# Altium PCB AX309.REV.1.0.PcbDoc (part 2 of 10)
Units mil, origin at the board's own origin, x right, y up, seen from the top; angles counter-clockwise.
Board outline 5185 x 3614 mil, 4 copper layers (Top Layer, GND, Mid-Layer 1, Bottom Layer); 191 components, 352 nets, 1106 pads, 425 vias.
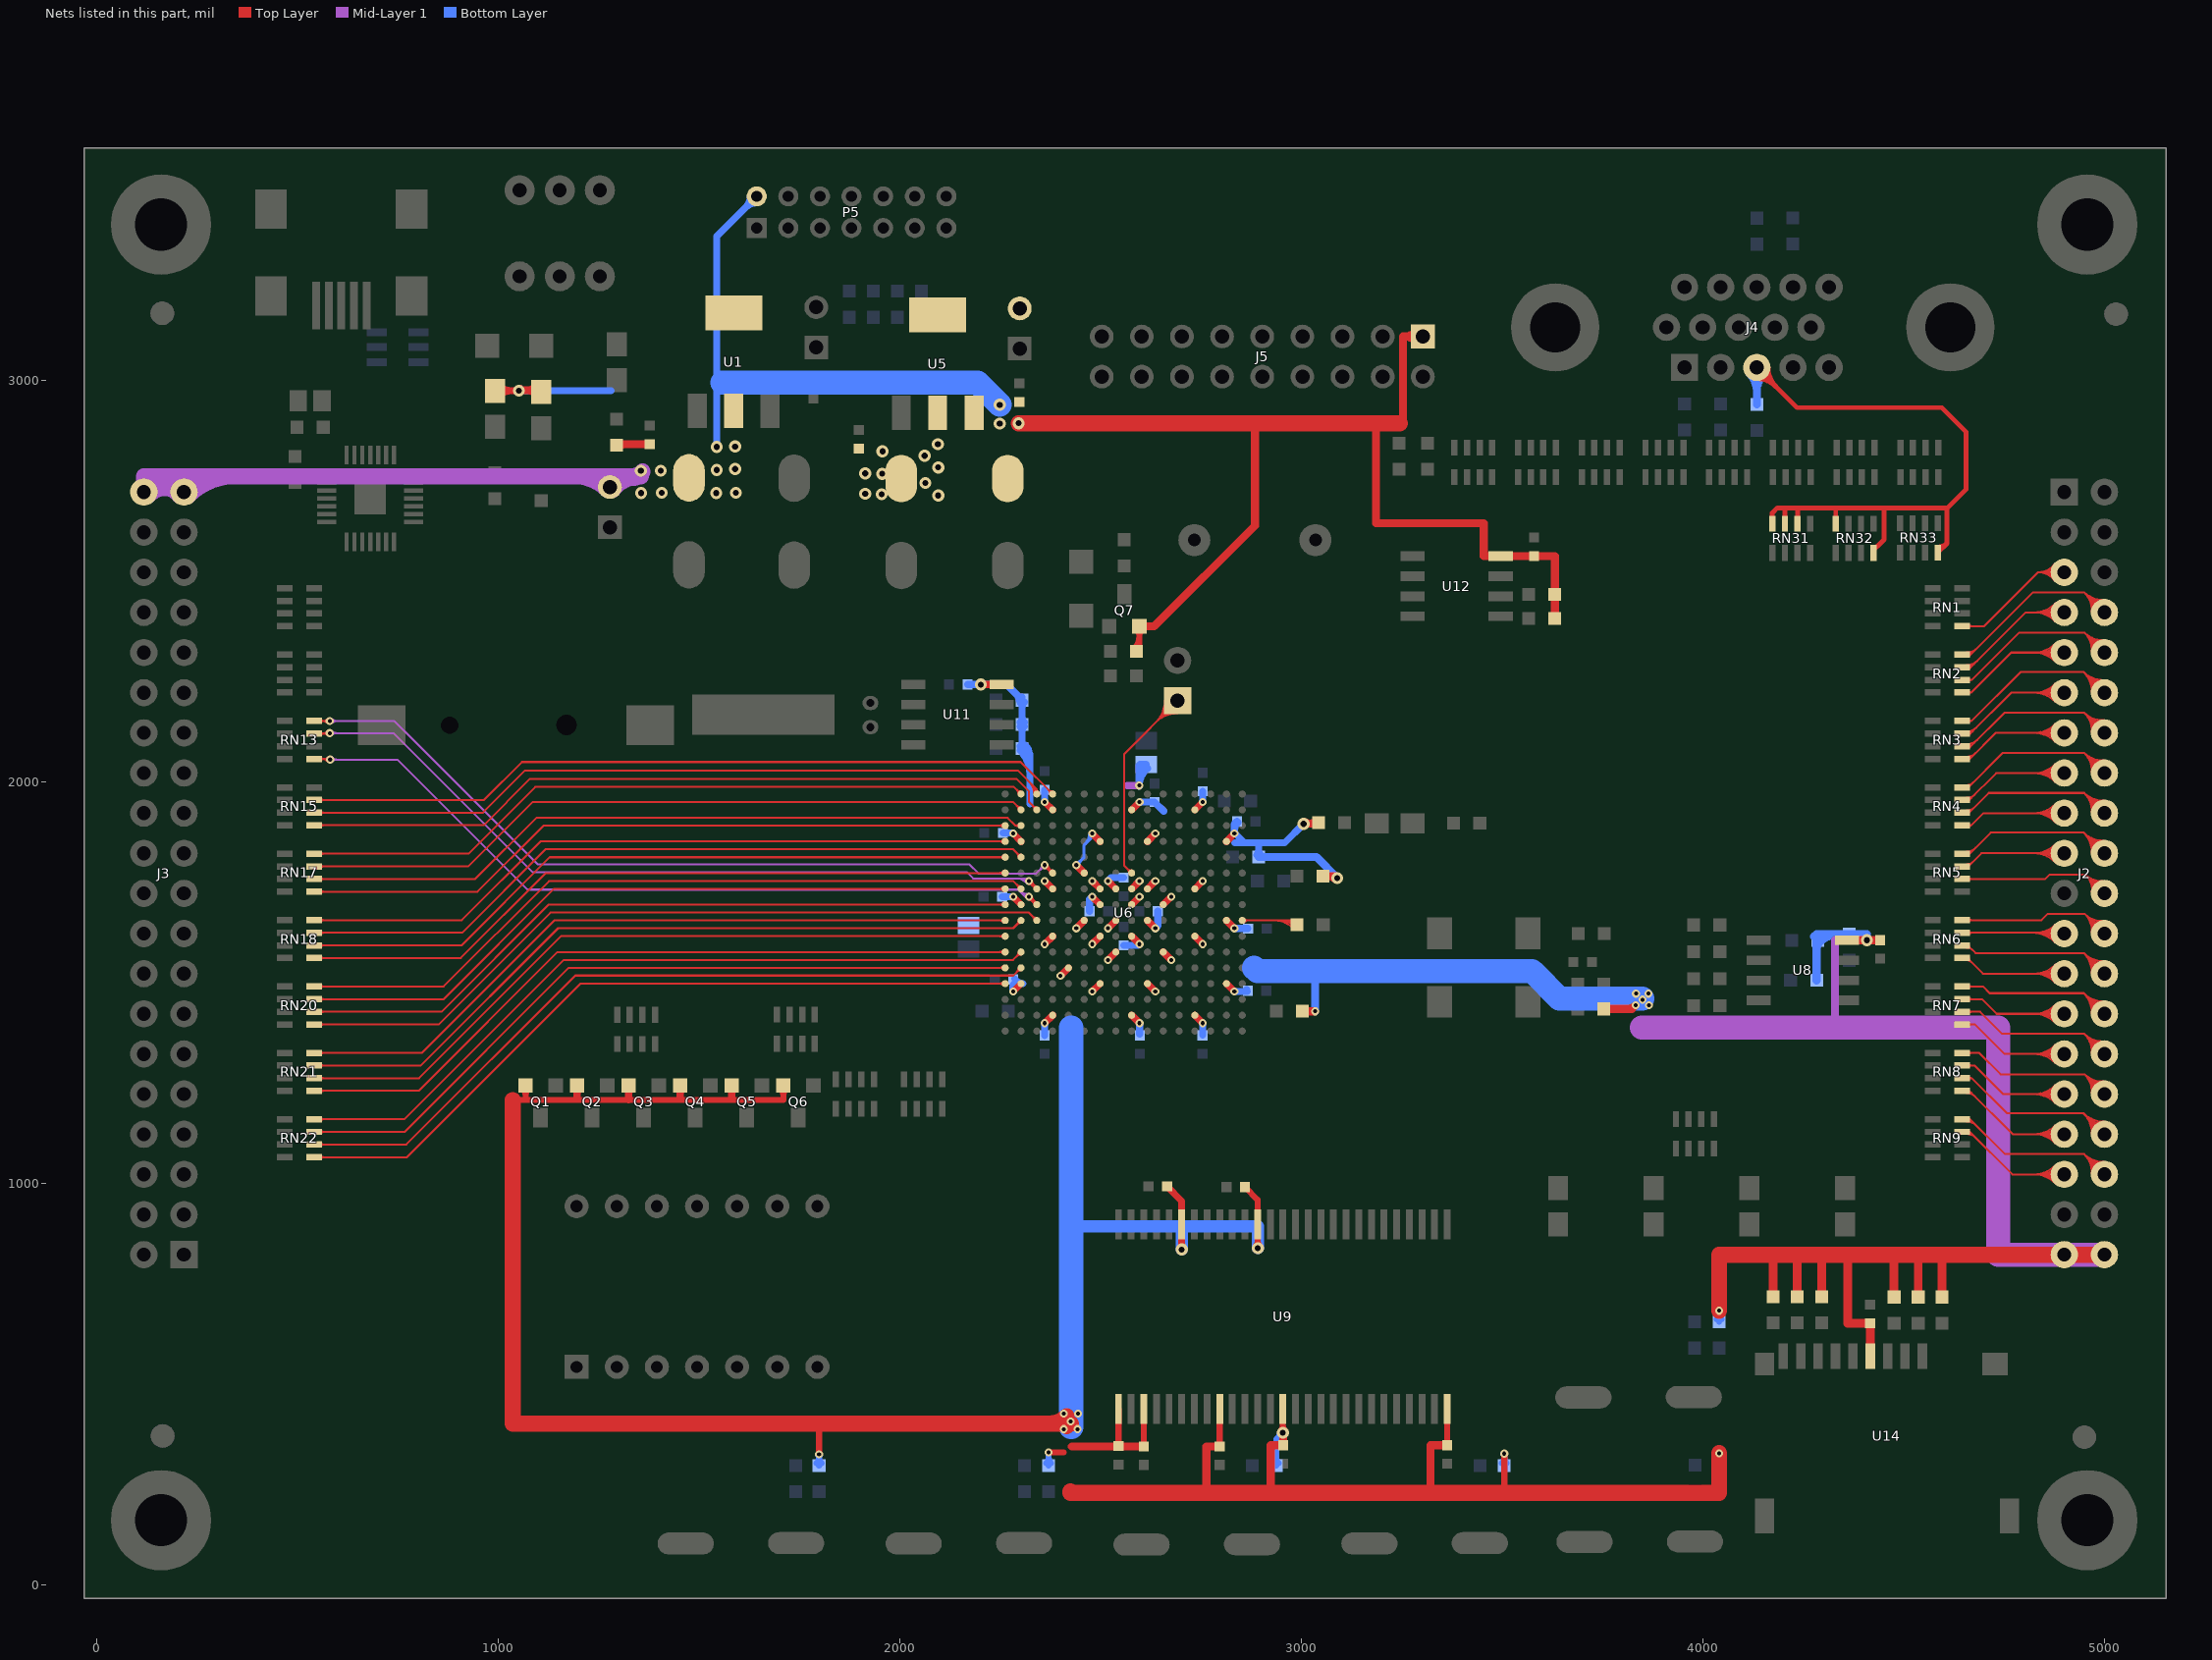
[diagram p4: the nets of this part, all layers, seen from the top]

## Via types
v1: diameter 20, hole 10, Top Layer to Bottom Layer, 328 vias
v2: diameter 30, hole 15, Top Layer to Bottom Layer, 95 vias
v3: diameter 40, hole 20, Top Layer to Bottom Layer, 2 vias

## Nets (pads, with @x,y where several pads share a name; then routed paths per layer and width w, separated by ;. In a path a pad name is that pad's centre, name@x,y a point inside that pad or via, vN(x,y) a via of type N, cw(c..) or ccw(c..) an arc to the next point about the centre after c; other vN are vias at no path point) (continued)
_L16: J2.5 RN1.5 | length 615.7
  Top Layer w5: RN1.5@4646.15,2387.51 4701.51,2387.51 4835.65,2521.65 ; RN1.5@4661.76,2383.71 cw(c4670.94,2374.54) 4670.94,2387.51 cw(c4670.94,2400.49) RN1.5@4661.76,2391.31 ; J2.5@4876.36,2502.03 ccw(c4835.66,2469.63) 4835.66,2521.65 ; J2.5@4876.36,2541.27 cw(c4835.66,2573.68) 4835.66,2521.65 ; J2.5@4880.27,2505.15 ccw(c4846.03,2477.89) 4846.03,2521.65 ccw(c4846.03,2565.42) J2.5@4880.27,2538.16 ; J2.5@4884.18,2508.26 ccw(c4856.4,2486.14) 4856.4,2521.65 ccw(c4856.4,2557.16) J2.5@4884.18,2535.05 ; J2.5@4888.09,2511.38 ccw(c4866.77,2494.4) 4866.77,2521.65 ccw(c4866.77,2548.9) J2.5@4888.09,2531.93 ; J2.5@4901,2521.65 4835.65,2521.65
_M4: J2.32 RN8.8 | length 735.9
  Top Layer w5: RN8.8@4646.15,1324.38 4688.62,1324.38 4742,1271 4951.65,1271 ; RN8.8@4661.76,1320.58 cw(c4670.94,1311.4) 4670.94,1324.38 cw(c4670.94,1337.35) RN8.8@4661.76,1328.17 ; J2.32@4969.56,1223.63 ccw(c4908.14,1227.48) 4951.66,1271 ; J2.32@4974.55,1223.31 ccw(c4922.88,1226.55) 4959.49,1263.16 ccw(c4996.1,1299.78) J2.32@4999.34,1248.1 ; J2.32@4979.54,1223 ccw(c4937.62,1225.63) 4967.32,1255.33 ccw(c4997.02,1285.04) J2.32@4999.65,1243.11 ; J2.32@4984.53,1222.69 ccw(c4952.36,1224.7) 4975.15,1247.5 ccw(c4997.95,1270.3) J2.32@4999.97,1238.12 ; J2.32@4999.03,1253.09 cw(c4995.18,1314.52) 4951.66,1271 ; J2.32@5001,1221.65 4951.65,1271
_M5: J2.35 RN9.7 | length 702.2
  Top Layer w5: RN9.7@4646.15,1127.5 4665.5,1127.5 4771.35,1021.65 J2.35@4901,1021.65 ; RN9.7@4657.96,1122.13 cw(c4657.96,1090.96) 4680,1113 ; RN9.7@4657.96,1127.13 cw(c4657.96,1108.04) 4671.46,1121.54 ; J2.35@4878.73,999.38 ccw(c4824.95,945.61) 4824.95,1021.65 ccw(c4824.95,1097.7) J2.35@4878.73,1043.93 ; J2.35@4882.26,1002.92 ccw(c4837.02,957.68) 4837.02,1021.65 ccw(c4837.02,1085.63) J2.35@4882.26,1040.39 ; J2.35@4885.8,1006.45 ccw(c4849.09,969.75) 4849.09,1021.65 ccw(c4849.09,1073.56) J2.35@4885.8,1036.86 ; J2.35@4889.33,1009.99 ccw(c4861.17,981.82) 4861.17,1021.65 ccw(c4861.17,1061.49) J2.35@4889.33,1033.32
_M15: J2.7 RN2.7 | length 748.9
  Top Layer w5: RN2.7@4646.15,2285.13 4668.13,2285.13 ; RN2.7@4657.96,2280.5 ccw(c4657.96,2293.88) 4667.42,2284.42 ; RN2.7@4657.96,2285.5 ccw(c4657.96,2310.95) 4675.96,2292.96 ; RN2.7@4657.96,2290.5 ccw(c4657.96,2328.02) 4684.49,2301.49 ; RN2.7@4662.4,2282.1 cw(c4668.13,2278.2) 4668.13,2285.13 ; RN2.7@4662.4,2288.16 ccw(c4668.13,2292.06) 4668.13,2285.13 ; J2.7@4878.73,2399.38 ccw(c4824.95,2345.61) 4824.95,2421.65 ccw(c4824.95,2497.7) J2.7@4878.73,2443.93 ; J2.7@4882.26,2402.92 ccw(c4837.02,2357.68) 4837.02,2421.65 ccw(c4837.02,2485.63) J2.7@4882.26,2440.39 ; J2.7@4885.8,2406.45 ccw(c4849.09,2369.75) 4849.09,2421.65 ccw(c4849.09,2473.56) J2.7@4885.8,2436.86 ; J2.7@4889.33,2409.99 ccw(c4861.17,2381.82) 4861.17,2421.65 ccw(c4861.17,2461.49) J2.7@4889.33,2433.32 ; J2.7@4901,2421.65 4804.65,2421.65 4668.13,2285.13
_M16: J2.8 RN2.8 | length 837.9
  Top Layer w5: RN2.8@4646.15,2316.62 4667.62,2316.62 ; RN2.8@4657.96,2312 ccw(c4657.96,2324.16) 4666.56,2315.56 ; RN2.8@4657.96,2317 ccw(c4657.96,2341.23) 4675.1,2324.1 ; RN2.8@4657.96,2322 ccw(c4657.96,2358.3) 4683.63,2332.63 ; RN2.8@4662.53,2313.79 cw(c4667.62,2310.62) 4667.62,2316.62 ; RN2.8@4662.53,2319.46 ccw(c4667.62,2322.63) 4667.62,2316.62 ; J2.8@4969.54,2423.15 ccw(c4904.9,2426.24) 4950.66,2472 ; J2.8@4974.53,2422.92 ccw(c4920.15,2425.51) 4958.65,2464.01 ccw(c4997.14,2502.5) J2.8@4999.74,2448.12 ; J2.8@4979.52,2422.68 ccw(c4935.41,2424.78) 4966.64,2456.02 ccw(c4997.87,2487.25) J2.8@4999.98,2443.13 ; J2.8@4984.52,2422.44 ccw(c4950.66,2424.06) 4974.63,2448.02 ccw(c4998.6,2471.99) J2.8@5000.21,2438.13 ; J2.8@4999.5,2453.12 cw(c4996.41,2517.76) 4950.66,2472 ; J2.8@5001,2421.65 4950.65,2472 ; 4667.62,2316.62 4823,2472 4950.65,2472
_N4: J2.36 RN9.8 | length 789.6
  Top Layer w5: RN9.8@4646.15,1159 4666,1159 ; RN9.8@4657.96,1153.63 cw(c4657.96,1121.24) 4680.86,1144.14 ; RN9.8@4657.96,1158.63 cw(c4657.96,1138.32) 4672.32,1152.68 ; RN9.8@4662.93,1156.95 cw(c4666,1155.67) 4666,1159 ; RN9.8@4662.93,1161.05 ccw(c4666,1162.33) 4666,1159 ; J2.36@4969.54,1023.15 ccw(c4904.9,1026.24) 4950.66,1072 ; J2.36@4974.53,1022.92 ccw(c4920.15,1025.51) 4958.65,1064.01 ccw(c4997.14,1102.5) J2.36@4999.74,1048.12 ; J2.36@4979.52,1022.68 ccw(c4935.41,1024.78) 4966.64,1056.02 ccw(c4997.87,1087.25) J2.36@4999.98,1043.13 ; J2.36@4984.52,1022.44 ccw(c4950.66,1024.06) 4974.63,1048.02 ccw(c4998.6,1071.99) J2.36@5000.21,1038.13 ; J2.36@4999.5,1053.12 cw(c4996.41,1117.76) 4950.66,1072 ; J2.36@5001,1021.65 4950.65,1072 ; 4666,1159 4753,1072 4950.65,1072
_N6: J2.34 RN8.6 | length 781.7
  Top Layer w5: RN8.6@4646.15,1261.38 4670.62,1261.38 ; RN8.6@4661.83,1257.65 cw(c4670.62,1249.17) 4670.62,1261.38 ; RN8.6@4661.83,1265.11 ccw(c4670.62,1273.6) 4670.62,1261.38 ; J2.34@4969.51,1122.26 ccw(c4898.29,1123.63) 4948.66,1174 ; J2.34@4974.5,1122.16 ccw(c4914.59,1123.32) 4956.96,1165.69 ccw(c4999.34,1208.06) J2.34@5000.49,1148.15 ; J2.34@4979.5,1122.07 ccw(c4930.89,1123) 4965.27,1157.38 ccw(c4999.65,1191.76) J2.34@5000.59,1143.15 ; J2.34@4984.5,1121.97 ccw(c4947.2,1122.69) 4973.58,1149.07 ccw(c4999.97,1175.46) J2.34@5000.68,1138.15 ; J2.34@5000.39,1153.15 cw(c4999.02,1224.37) 4948.66,1174 ; J2.34@5001,1121.65 4948.65,1174 ; 4670.62,1261.38 4758,1174 4948.65,1174
_N16: J2.10 RN2.6 | length 761.7
  Top Layer w5: RN2.6@4646.15,2253.63 4670.63,2253.63 ; RN2.6@4661.82,2249.9 cw(c4670.63,2241.38) 4670.63,2253.63 ; RN2.6@4661.82,2257.37 ccw(c4670.63,2265.88) 4670.63,2253.63 ; J2.10@4969.56,2323.63 ccw(c4908.14,2327.48) 4951.66,2371 ; J2.10@4974.55,2323.31 ccw(c4922.88,2326.55) 4959.49,2363.16 ccw(c4996.1,2399.78) J2.10@4999.34,2348.1 ; J2.10@4979.54,2323 ccw(c4937.62,2325.63) 4967.32,2355.33 ccw(c4997.02,2385.04) J2.10@4999.65,2343.11 ; J2.10@4984.53,2322.69 ccw(c4952.36,2324.7) 4975.15,2347.5 ccw(c4997.95,2370.3) J2.10@4999.97,2338.12 ; J2.10@4999.03,2353.09 cw(c4995.18,2414.52) 4951.66,2371 ; J2.10@5001,2321.65 4951.65,2371 ; 4670.63,2253.63 4788,2371 4951.65,2371
_P2: J2.31 RN8.7 | length 668.8
  Top Layer w5: RN8.7@4646.15,1292.88 4677.12,1292.88 4748.35,1221.65 J2.31@4901,1221.65 ; RN8.7@4661.76,1289.08 cw(c4670.94,1279.9) 4670.94,1292.88 cw(c4670.94,1305.85) RN8.7@4661.76,1296.68 ; J2.31@4878.73,1199.38 ccw(c4824.95,1145.61) 4824.95,1221.65 ccw(c4824.95,1297.7) J2.31@4878.73,1243.93 ; J2.31@4882.26,1202.92 ccw(c4837.02,1157.68) 4837.02,1221.65 ccw(c4837.02,1285.63) J2.31@4882.26,1240.39 ; J2.31@4885.8,1206.45 ccw(c4849.09,1169.75) 4849.09,1221.65 ccw(c4849.09,1273.56) J2.31@4885.8,1236.86 ; J2.31@4889.33,1209.99 ccw(c4861.17,1181.82) 4861.17,1221.65 ccw(c4861.17,1261.49) J2.31@4889.33,1233.32
_P6: J2.33 RN8.5 | length 698
  Top Layer w5: RN8.5@4646.15,1229.89 4664.11,1229.89 4772.35,1121.65 J2.33@4901,1121.65 ; RN8.5@4657.96,1224.51 cw(c4657.96,1196.69) 4677.64,1216.36 ; RN8.5@4657.96,1229.51 cw(c4657.96,1213.76) 4669.1,1224.9 ; J2.33@4878.73,1099.38 ccw(c4824.95,1045.61) 4824.95,1121.65 ccw(c4824.95,1197.7) J2.33@4878.73,1143.93 ; J2.33@4882.26,1102.92 ccw(c4837.02,1057.68) 4837.02,1121.65 ccw(c4837.02,1185.63) J2.33@4882.26,1140.39 ; J2.33@4885.8,1106.45 ccw(c4849.09,1069.75) 4849.09,1121.65 ccw(c4849.09,1173.56) J2.33@4885.8,1136.86 ; J2.33@4889.33,1109.99 ccw(c4861.17,1081.82) 4861.17,1121.65 ccw(c4861.17,1161.49) J2.33@4889.33,1133.32
_P15: J2.12 RN3.8 | length 784.3
  Top Layer w5: RN3.8@4646.15,2151.25 4670.25,2151.25 ; RN3.8@4661.91,2147.6 cw(c4670.25,2139.89) 4670.25,2151.25 ; RN3.8@4661.91,2154.9 ccw(c4670.25,2162.61) 4670.25,2151.25 ; J2.12@4969.52,2222.7 ccw(c4901.62,2224.96) 4949.66,2273 ; J2.12@4974.51,2222.53 ccw(c4917.39,2224.43) 4957.81,2264.85 ccw(c4998.22,2305.26) J2.12@5000.12,2248.14 ; J2.12@4979.51,2222.37 ccw(c4933.17,2223.91) 4965.96,2256.7 ccw(c4998.74,2289.49) J2.12@5000.29,2243.14 ; J2.12@4984.51,2222.2 ccw(c4948.94,2223.38) 4974.11,2248.55 ccw(c4999.27,2273.71) J2.12@5000.45,2238.14 ; J2.12@4999.95,2253.14 cw(c4997.7,2321.04) 4949.66,2273 ; J2.12@5001,2221.65 4949.65,2273 ; 4670.25,2151.25 4792,2273 4949.65,2273
_P16: J2.9 RN2.5 | length 676.1
  Top Layer w5: RN2.5@4646.15,2222.14 4669.14,2222.14 ; RN2.5@4662.16,2218.78 cw(c4669.14,2213.2) 4669.14,2222.14 ; RN2.5@4662.16,2225.49 ccw(c4669.14,2231.07) 4669.14,2222.14 ; J2.9@4878.73,2299.38 ccw(c4824.95,2245.61) 4824.95,2321.65 ccw(c4824.95,2397.7) J2.9@4878.73,2343.93 ; J2.9@4882.26,2302.92 ccw(c4837.02,2257.68) 4837.02,2321.65 ccw(c4837.02,2385.63) J2.9@4882.26,2340.39 ; J2.9@4885.8,2306.45 ccw(c4849.09,2269.75) 4849.09,2321.65 ccw(c4849.09,2373.56) J2.9@4885.8,2336.86 ; J2.9@4889.33,2309.99 ccw(c4861.17,2281.82) 4861.17,2321.65 ccw(c4861.17,2361.49) J2.9@4889.33,2333.32 ; J2.9@4901,2321.65 4768.65,2321.65 4669.14,2222.14
_R1: J2.29 RN7.5 | length 669.8
  Top Layer w5: RN7.5@4646.15,1395.26 4678.74,1395.26 4752.35,1321.65 J2.29@4901,1321.65 ; RN7.5@4661.76,1391.46 cw(c4670.94,1382.29) 4670.94,1395.26 cw(c4670.94,1408.24) RN7.5@4661.76,1399.06 ; J2.29@4878.73,1299.38 ccw(c4824.95,1245.61) 4824.95,1321.65 ccw(c4824.95,1397.7) J2.29@4878.73,1343.93 ; J2.29@4882.26,1302.92 ccw(c4837.02,1257.68) 4837.02,1321.65 ccw(c4837.02,1385.63) J2.29@4882.26,1340.39 ; J2.29@4885.8,1306.45 ccw(c4849.09,1269.75) 4849.09,1321.65 ccw(c4849.09,1373.56) J2.29@4885.8,1336.86 ; J2.29@4889.33,1309.99 ccw(c4861.17,1281.82) 4861.17,1321.65 ccw(c4861.17,1361.49) J2.29@4889.33,1333.32
_R2: J2.30 RN7.6 | length 747.4
  Top Layer w5: RN7.6@4646.15,1426.76 4691.24,1426.76 4746,1372 4950.65,1372 ; RN7.6@4661.76,1422.96 cw(c4670.94,1413.78) 4670.94,1426.76 cw(c4670.94,1439.73) RN7.6@4661.76,1430.56 ; J2.30@4969.54,1323.15 ccw(c4904.9,1326.24) 4950.66,1372 ; J2.30@4974.53,1322.92 ccw(c4920.15,1325.51) 4958.65,1364.01 ccw(c4997.14,1402.5) J2.30@4999.74,1348.12 ; J2.30@4979.52,1322.68 ccw(c4935.41,1324.78) 4966.64,1356.02 ccw(c4997.87,1387.25) J2.30@4999.98,1343.13 ; J2.30@4984.52,1322.44 ccw(c4950.66,1324.06) 4974.63,1348.02 ccw(c4998.6,1371.99) J2.30@5000.21,1338.13 ; J2.30@4999.5,1353.12 cw(c4996.41,1417.76) 4950.66,1372 ; J2.30@5001,1321.65 4950.65,1372
_R5: J2.28 RN7.8 | length 742.4
  Top Layer w5: RN7.8@4646.15,1489.75 4698.25,1489.75 4715,1473 4949.65,1473 ; RN7.8@4661.76,1485.95 cw(c4670.94,1476.78) 4670.94,1489.75 cw(c4670.94,1502.72) RN7.8@4661.76,1493.55 ; J2.28@4969.52,1422.7 ccw(c4901.62,1424.96) 4949.66,1473 ; J2.28@4974.51,1422.53 ccw(c4917.39,1424.43) 4957.81,1464.85 ccw(c4998.22,1505.26) J2.28@5000.12,1448.14 ; J2.28@4979.51,1422.37 ccw(c4933.17,1423.91) 4965.96,1456.7 ccw(c4998.74,1489.49) J2.28@5000.29,1443.14 ; J2.28@4984.51,1422.2 ccw(c4948.94,1423.38) 4974.11,1448.55 ccw(c4999.27,1473.71) J2.28@5000.45,1438.14 ; J2.28@4999.95,1453.14 cw(c4997.7,1521.04) 4949.66,1473 ; J2.28@5001,1421.65 4949.65,1473
_R7: J2.23 RN6.7 | length 637.3
  Top Layer w5: RN6.7@4646.15,1623.63 J2.23@4899.02,1623.63 ; RN6.7@4661.76,1619.83 cw(c4670.94,1610.65) 4670.94,1623.63 cw(c4670.94,1636.6) RN6.7@4661.76,1627.43 ; 4820.18,1623.63 cw(c4820.18,1540.84) J2.23@4878.73,1599.38 ; 4829.72,1623.63 ccw(c4829.72,1692.93) J2.23@4878.73,1643.93 ; 4832.25,1623.63 cw(c4832.25,1552.91) J2.23@4882.26,1602.92 ; 4841.79,1623.63 ccw(c4841.79,1680.86) J2.23@4882.26,1640.39 ; 4844.33,1623.63 cw(c4844.33,1564.98) J2.23@4885.8,1606.45 ; 4853.86,1623.63 ccw(c4853.86,1668.79) J2.23@4885.8,1636.86 ; 4856.4,1623.63 cw(c4856.4,1577.05) J2.23@4889.33,1609.99 ; 4865.93,1623.63 ccw(c4865.93,1656.72) J2.23@4889.33,1633.32
_R9: J2.19 RN5.7 | length 658.7
  Top Layer w5: RN5.7@4646.15,1789 4662,1789 4694.65,1821.65 J2.19@4901,1821.65 ; RN5.7@4657.96,1789.38 ccw(c4657.96,1800.04) RN5.7@4665.5,1792.5 ; RN5.7@4657.96,1794.38 ccw(c4657.96,1817.11) 4674.04,1801.04 ; J2.19@4878.73,1799.38 ccw(c4824.95,1745.61) 4824.95,1821.65 ccw(c4824.95,1897.7) J2.19@4878.73,1843.93 ; J2.19@4882.26,1802.92 ccw(c4837.02,1757.68) 4837.02,1821.65 ccw(c4837.02,1885.63) J2.19@4882.26,1840.39 ; J2.19@4885.8,1806.45 ccw(c4849.09,1769.75) 4849.09,1821.65 ccw(c4849.09,1873.56) J2.19@4885.8,1836.86 ; J2.19@4889.33,1809.99 ccw(c4861.17,1781.82) 4861.17,1821.65 ccw(c4861.17,1861.49) J2.19@4889.33,1833.32
_R12: J2.17 RN4.5 | length 648.1
  Top Layer w5: RN4.5@4646.15,1891.39 4669.39,1891.39 ; RN4.5@4662.1,1887.96 cw(c4669.39,1881.93) 4669.39,1891.39 ; RN4.5@4662.1,1894.81 ccw(c4669.39,1900.84) 4669.39,1891.39 ; J2.17@4878.73,1899.38 ccw(c4824.95,1845.61) 4824.95,1921.65 ccw(c4824.95,1997.7) J2.17@4878.73,1943.93 ; J2.17@4882.26,1902.92 ccw(c4837.02,1857.68) 4837.02,1921.65 ccw(c4837.02,1985.63) J2.17@4882.26,1940.39 ; J2.17@4885.8,1906.45 ccw(c4849.09,1869.75) 4849.09,1921.65 ccw(c4849.09,1973.56) J2.17@4885.8,1936.86 ; J2.17@4889.33,1909.99 ccw(c4861.17,1881.82) 4861.17,1921.65 ccw(c4861.17,1961.49) J2.17@4889.33,1933.32 ; J2.17@4901,1921.65 4699.65,1921.65 4669.39,1891.39
_R14: J2.16 RN4.8 | length 765.7
  Top Layer w5: RN4.8@4646.15,1985.88 4661.88,1985.88 4748,2072 4950.65,2072 ; RN4.8@4657.96,1986.25 ccw(c4657.96,1996.6) RN4.8@4665.28,1989.28 ; RN4.8@4657.96,1991.25 ccw(c4657.96,2013.67) 4673.82,1997.82 ; J2.16@4969.54,2023.15 ccw(c4904.9,2026.24) 4950.66,2072 ; J2.16@4974.53,2022.92 ccw(c4920.15,2025.51) 4958.65,2064.01 ccw(c4997.14,2102.5) J2.16@4999.74,2048.12 ; J2.16@4979.52,2022.68 ccw(c4935.41,2024.78) 4966.64,2056.02 ccw(c4997.87,2087.25) J2.16@4999.98,2043.13 ; J2.16@4984.52,2022.44 ccw(c4950.66,2024.06) 4974.63,2048.02 ccw(c4998.6,2071.99) J2.16@5000.21,2038.13 ; J2.16@4999.5,2053.12 cw(c4996.41,2117.76) 4950.66,2072 ; J2.16@5001,2021.65 4950.65,2072
_R15: J2.14 RN3.6 | length 813.5
  Top Layer w5: RN3.6@4646.15,2088.26 4668.26,2088.26 ; RN3.6@4657.96,2083.63 ccw(c4657.96,2097.32) 4667.64,2087.64 ; RN3.6@4657.96,2088.63 ccw(c4657.96,2114.39) 4676.18,2096.18 ; RN3.6@4657.96,2093.63 ccw(c4657.96,2131.46) 4684.71,2104.71 ; RN3.6@4662.37,2085.18 cw(c4668.26,2081.08) 4668.26,2088.26 ; RN3.6@4662.37,2091.33 ccw(c4668.26,2095.43) 4668.26,2088.26 ; J2.14@4969.54,2123.15 ccw(c4904.9,2126.24) 4950.66,2172 ; J2.14@4974.53,2122.92 ccw(c4920.15,2125.51) 4958.65,2164.01 ccw(c4997.14,2202.5) J2.14@4999.74,2148.12 ; J2.14@4979.52,2122.68 ccw(c4935.41,2124.78) 4966.64,2156.02 ccw(c4997.87,2187.25) J2.14@4999.98,2143.13 ; J2.14@4984.52,2122.44 ccw(c4950.66,2124.06) 4974.63,2148.02 ccw(c4998.6,2171.99) J2.14@5000.21,2138.13 ; J2.14@4999.5,2153.12 cw(c4996.41,2217.76) 4950.66,2172 ; J2.14@5001,2121.65 4950.65,2172 ; 4668.26,2088.26 4752,2172 4950.65,2172
_R16: J2.11 RN3.7 | length 715.2
  Top Layer w5: RN3.7@4646.15,2119.75 4666.75,2119.75 ; RN3.7@4657.96,2120.13 ccw(c4657.96,2142.26) 4673.61,2126.61 ; RN3.7@4657.96,2125.13 ccw(c4657.96,2159.33) 4682.15,2135.15 ; RN3.7@4662.74,2117.3 cw(c4666.75,2115.25) 4666.75,2119.75 ; RN3.7@4662.74,2122.2 ccw(c4666.75,2124.26) 4666.75,2119.75 ; J2.11@4878.73,2199.38 ccw(c4824.95,2145.61) 4824.95,2221.65 ccw(c4824.95,2297.7) J2.11@4878.73,2243.93 ; J2.11@4882.26,2202.92 ccw(c4837.02,2157.68) 4837.02,2221.65 ccw(c4837.02,2285.63) J2.11@4882.26,2240.39 ; J2.11@4885.8,2206.45 ccw(c4849.09,2169.75) 4849.09,2221.65 ccw(c4849.09,2273.56) J2.11@4885.8,2236.86 ; J2.11@4889.33,2209.99 ccw(c4861.17,2181.82) 4861.17,2221.65 ccw(c4861.17,2261.49) J2.11@4889.33,2233.32 ; J2.11@4901,2221.65 4768.65,2221.65 4666.75,2119.75
_T4: J2.27 RN7.7 | length 654.4
  Top Layer w5: RN7.7@4646.15,1458.25 4695.75,1458.25 4732.35,1421.65 J2.27@4901,1421.65 ; RN7.7@4661.76,1454.45 cw(c4670.94,1445.28) 4670.94,1458.25 cw(c4670.94,1471.23) RN7.7@4661.76,1462.05 ; J2.27@4878.73,1399.38 ccw(c4824.95,1345.61) 4824.95,1421.65 ccw(c4824.95,1497.7) J2.27@4878.73,1443.93 ; J2.27@4882.26,1402.92 ccw(c4837.02,1357.68) 4837.02,1421.65 ccw(c4837.02,1485.63) J2.27@4882.26,1440.39 ; J2.27@4885.8,1406.45 ccw(c4849.09,1369.75) 4849.09,1421.65 ccw(c4849.09,1473.56) J2.27@4885.8,1436.86 ; J2.27@4889.33,1409.99 ccw(c4861.17,1381.82) 4861.17,1421.65 ccw(c4861.17,1461.49) J2.27@4889.33,1433.32
_T5: J2.25 RN6.5 | length 655.4
  Top Layer w5: RN6.5@4646.15,1560.64 4659.36,1560.64 4698.35,1521.65 J2.25@4901,1521.65 ; RN6.5@4657.96,1555.26 cw(c4657.96,1538.9) 4669.53,1550.47 ; RN6.5@4663.33,1560.64 ccw(c4672.92,1560.64) 4666.14,1553.86 ; J2.25@4878.73,1499.38 ccw(c4824.95,1445.61) 4824.95,1521.65 ccw(c4824.95,1597.7) J2.25@4878.73,1543.93 ; J2.25@4882.26,1502.92 ccw(c4837.02,1457.68) 4837.02,1521.65 ccw(c4837.02,1585.63) J2.25@4882.26,1540.39 ; J2.25@4885.8,1506.45 ccw(c4849.09,1469.75) 4849.09,1521.65 ccw(c4849.09,1573.56) J2.25@4885.8,1536.86 ; J2.25@4889.33,1509.99 ccw(c4861.17,1481.82) 4861.17,1521.65 ccw(c4861.17,1561.49) J2.25@4889.33,1533.32
_T6: J2.26 RN6.6 | length 743.4
  Top Layer w5: RN6.6@4646.15,1592.13 4660.87,1592.13 4680,1573 4949.65,1573 ; RN6.6@4657.96,1586.76 cw(c4657.96,1566.77) 4672.1,1580.9 ; RN6.6@4663.34,1592.13 ccw(c4669.29,1592.13) RN6.6@4665.08,1587.92 ; J2.26@4969.52,1522.7 ccw(c4901.62,1524.96) 4949.66,1573 ; J2.26@4974.51,1522.53 ccw(c4917.39,1524.43) 4957.81,1564.85 ccw(c4998.22,1605.26) J2.26@5000.12,1548.14 ; J2.26@4979.51,1522.37 ccw(c4933.17,1523.91) 4965.96,1556.7 ccw(c4998.74,1589.49) J2.26@5000.29,1543.14 ; J2.26@4984.51,1522.2 ccw(c4948.94,1523.38) 4974.11,1548.55 ccw(c4999.27,1573.71) J2.26@5000.45,1538.14 ; J2.26@4999.95,1553.14 cw(c4997.7,1621.04) 4949.66,1573 ; J2.26@5001,1521.65 4949.65,1573
_T7: J2.24 RN6.8 | length 709
  Top Layer w5: RN6.8@4646.15,1655.12 4844.12,1655.12 4859,1670 4952.65,1670 ; RN6.8@4661.76,1651.33 cw(c4670.94,1642.15) 4670.94,1655.12 cw(c4670.94,1668.1) RN6.8@4661.76,1658.92 ; J2.24@4969.6,1624.11 ccw(c4911.33,1628.67) 4952.66,1670 ; J2.24@4974.58,1623.72 ccw(c4925.56,1627.56) 4960.33,1662.32 ccw(c4995.1,1697.09) J2.24@4998.93,1648.07 ; J2.24@4979.57,1623.33 ccw(c4939.79,1626.44) 4968,1654.65 ccw(c4996.21,1682.86) J2.24@4999.32,1643.09 ; J2.24@4984.55,1622.94 ccw(c4954.03,1625.33) 4975.68,1646.98 ccw(c4997.32,1668.62) J2.24@4999.71,1638.1 ; J2.24@4998.54,1653.06 cw(c4993.98,1711.33) 4952.66,1670 ; J2.24@5001,1621.65 4952.65,1670
_T9: J2.22 RN5.6 | length 685.2
  Top Layer w5: RN5.6@4646.15,1757.51 4853.51,1757.51 4864,1768 4954.65,1768 ; RN5.6@4661.76,1753.71 cw(c4670.94,1744.53) 4670.94,1757.51 cw(c4670.94,1770.48) RN5.6@4661.76,1761.31 ; J2.22@4969.69,1725.13 ccw(c4917.58,1730.92) 4954.66,1768 ; J2.22@4974.66,1724.58 ccw(c4930.82,1729.45) 4962.01,1760.64 ccw(c4993.2,1791.83) J2.22@4998.07,1747.99 ; J2.22@4979.63,1724.03 ccw(c4944.06,1727.98) 4969.37,1753.29 ccw(c4994.67,1778.59) J2.22@4998.63,1743.02 ; J2.22@4984.6,1723.48 ccw(c4957.3,1726.51) 4976.72,1745.93 ccw(c4996.15,1765.35) J2.22@4999.18,1738.05 ; J2.22@4997.52,1752.96 cw(c4991.73,1805.08) 4954.66,1768 ; J2.22@5001,1721.65 4954.65,1768
_T12: J2.20 RN5.8 | length 776.4
  Top Layer w5: RN5.8@4646.15,1820.5 4665.5,1820.5 4718,1873 4949.65,1873 ; RN5.8@4657.96,1820.87 ccw(c4657.96,1839.98) 4671.47,1826.47 ; RN5.8@4657.96,1825.87 ccw(c4657.96,1857.05) 4680,1835 ; J2.20@4969.52,1822.7 ccw(c4901.62,1824.96) 4949.66,1873 ; J2.20@4974.51,1822.53 ccw(c4917.39,1824.43) 4957.81,1864.85 ccw(c4998.22,1905.26) J2.20@5000.12,1848.14 ; J2.20@4979.51,1822.37 ccw(c4933.17,1823.91) 4965.96,1856.7 ccw(c4998.74,1889.49) J2.20@5000.29,1843.14 ; J2.20@4984.51,1822.2 ccw(c4948.94,1823.38) 4974.11,1848.55 ccw(c4999.27,1873.71) J2.20@5000.45,1838.14 ; J2.20@4999.95,1853.14 cw(c4997.7,1921.04) 4949.66,1873 ; J2.20@5001,1821.65 4949.65,1873
_T13: J2.18 RN4.6 | length 758
  Top Layer w5: RN4.6@4646.15,1922.88 4663.88,1922.88 4713,1972 4950.65,1972 ; RN4.6@4657.96,1923.26 ccw(c4657.96,1938.46) 4668.71,1927.71 ; RN4.6@4657.96,1928.26 ccw(c4657.96,1955.53) 4677.24,1936.24 ; J2.18@4969.54,1923.15 ccw(c4904.9,1926.24) 4950.66,1972 ; J2.18@4974.53,1922.92 ccw(c4920.15,1925.51) 4958.65,1964.01 ccw(c4997.14,2002.5) J2.18@4999.74,1948.12 ; J2.18@4979.52,1922.68 ccw(c4935.41,1924.78) 4966.64,1956.02 ccw(c4997.87,1987.25) J2.18@4999.98,1943.13 ; J2.18@4984.52,1922.44 ccw(c4950.66,1924.06) 4974.63,1948.02 ccw(c4998.6,1971.99) J2.18@5000.21,1938.13 ; J2.18@4999.5,1953.12 cw(c4996.41,2017.76) 4950.66,1972 ; J2.18@5001,1921.65 4950.65,1972
_T14: J2.15 RN4.7 | length 681.1
  Top Layer w5: RN4.7@4646.15,1954.38 4664.38,1954.38 4731,2021 J2.15@4900.35,2021 ; RN4.7@4657.96,1954.75 ccw(c4657.96,1971.15) 4669.56,1959.56 ; RN4.7@4657.96,1959.75 ccw(c4657.96,1988.22) 4678.09,1968.09 ; 4823.37,2021 ccw(c4823.37,2099.28) J2.15@4878.73,2043.93 ; 4826.53,2021 cw(c4826.53,1947.18) J2.15@4878.73,1999.38 ; 4835.45,2021 ccw(c4835.45,2087.21) J2.15@4882.26,2040.39 ; 4838.6,2021 cw(c4838.6,1959.25) J2.15@4882.26,2002.92 ; 4847.52,2021 ccw(c4847.52,2075.14) J2.15@4885.8,2036.86 ; 4850.67,2021 cw(c4850.67,1971.33) J2.15@4885.8,2006.45 ; 4859.59,2021 ccw(c4859.59,2063.07) J2.15@4889.33,2033.32 ; 4862.74,2021 cw(c4862.74,1983.4) J2.15@4889.33,2009.99
_T15: J2.13 RN3.5 | length 686.3
  Top Layer w5: RN3.5@4646.15,2056.76 4665.76,2056.76 4730.65,2121.65 J2.13@4901,2121.65 ; RN3.5@4657.96,2057.14 ccw(c4657.96,2076.87) 4671.92,2062.92 ; RN3.5@4657.96,2062.14 ccw(c4657.96,2093.94) 4680.45,2071.45 ; J2.13@4878.73,2099.38 ccw(c4824.95,2045.61) 4824.95,2121.65 ccw(c4824.95,2197.7) J2.13@4878.73,2143.93 ; J2.13@4882.26,2102.92 ccw(c4837.02,2057.68) 4837.02,2121.65 ccw(c4837.02,2185.63) J2.13@4882.26,2140.39 ; J2.13@4885.8,2106.45 ccw(c4849.09,2069.75) 4849.09,2121.65 ccw(c4849.09,2173.56) J2.13@4885.8,2136.86 ; J2.13@4889.33,2109.99 ccw(c4861.17,2081.82) 4861.17,2121.65 ccw(c4861.17,2161.49) J2.13@4889.33,2133.32
A4: RN22.5 U6.A4 | length 1945.1
  Top Layer w5: RN22.5@541.15,1064.51 772.51,1064.51 1204.83,1496.83 U6.A4@2262.72,1496.83 ; RN22.5@556.76,1060.71 cw(c565.93,1051.54) 565.93,1064.51 cw(c565.93,1077.49) RN22.5@556.76,1068.31 ; U6.A4@2258.23,1492.34 ccw(c2247.37,1481.48) 2247.37,1496.83 ccw(c2247.37,1512.18) U6.A4@2258.23,1501.33
A5: RN22.7 U6.A5 | length 1935.4
  Top Layer w5: RN22.7@541.15,1127.5 766.5,1127.5 1175.2,1536.2 U6.A5@2262.72,1536.2 ; RN22.7@556.76,1123.7 cw(c565.93,1114.53) 565.93,1127.5 cw(c565.93,1140.48) RN22.7@556.76,1131.3 ; U6.A5@2258.23,1531.71 ccw(c2247.37,1520.85) 2247.37,1536.2 ccw(c2247.37,1551.55) U6.A5@2258.23,1540.7
A6: RN21.5 U6.A6 | length 1909.3
  Top Layer w5: RN21.5@541.15,1229.89 801.89,1229.89 1147.57,1575.57 U6.A6@2262.72,1575.57 ; RN21.5@556.76,1226.09 cw(c565.93,1216.91) 565.93,1229.89 cw(c565.93,1242.86) RN21.5@556.76,1233.69 ; U6.A6@2258.23,1571.08 ccw(c2247.37,1560.22) 2247.37,1575.57 ccw(c2247.37,1590.92) U6.A6@2258.23,1580.07
A7: RN21.6 U6.A7 | length 1912.5
  Top Layer w5: RN21.6@541.15,1261.38 802.38,1261.38 1155.94,1614.94 U6.A7@2262.72,1614.94 ; RN21.6@556.76,1257.58 cw(c565.93,1248.41) 565.93,1261.38 cw(c565.93,1274.36) RN21.6@556.76,1265.18 ; U6.A7@2258.23,1610.45 ccw(c2247.37,1599.59) 2247.37,1614.94 ccw(c2247.37,1630.3) U6.A7@2258.23,1619.44
A8: RN21.8 U6.A8 | length 1902.7
  Top Layer w5: RN21.8@541.15,1324.38 809.38,1324.38 1139.32,1654.32 U6.A8@2262.72,1654.32 ; RN21.8@556.76,1320.58 cw(c565.93,1311.4) 565.93,1324.38 cw(c565.93,1337.35) RN21.8@556.76,1328.17 ; U6.A8@2258.23,1649.82 ccw(c2247.37,1638.96) 2247.37,1654.32 ccw(c2247.37,1669.67) U6.A8@2258.23,1658.81
A9: RN20.6 U6.A9 | length 1876.6
  Top Layer w5: RN20.6@541.15,1426.76 858.76,1426.76 1125.68,1693.68 U6.A9@2262.72,1693.68 ; RN20.6@556.76,1422.96 cw(c565.93,1413.78) 565.93,1426.76 cw(c565.93,1439.73) RN20.6@556.76,1430.56 ; U6.A9@2258.23,1689.19 ccw(c2247.37,1678.33) 2247.37,1693.68 ccw(c2247.37,1709.04) U6.A9@2258.23,1698.18
A10: RN20.7 U6.A10 | length 1879.9
  Top Layer w5: RN20.7@541.15,1458.25 864.25,1458.25 1139.06,1733.06 U6.A10@2262.72,1733.06 ; RN20.7@556.76,1454.45 cw(c565.93,1445.28) 565.93,1458.25 cw(c565.93,1471.23) RN20.7@556.76,1462.05 ; U6.A10@2258.23,1728.56 ccw(c2247.37,1717.7) 2247.37,1733.06 ccw(c2247.37,1748.41) U6.A10@2258.23,1737.55
A11: RN18.5 U6.A11 | length 1853.8
  Top Layer w5: RN18.5@541.15,1560.64 906.64,1560.64 1118.43,1772.43 U6.A11@2262.72,1772.43 ; RN18.5@556.76,1556.84 cw(c565.93,1547.66) 565.93,1560.64 cw(c565.93,1573.61) RN18.5@556.76,1564.44 ; U6.A11@2258.23,1767.93 ccw(c2247.37,1757.08) 2247.37,1772.43 ccw(c2247.37,1787.78) U6.A11@2258.23,1776.92
A12: RN18.6 U6.A12 | length 1857.1
  Top Layer w5: RN18.6@541.15,1592.13 908.13,1592.13 1127.8,1811.8 U6.A12@2262.72,1811.8 ; RN18.6@556.76,1588.33 cw(c565.93,1579.16) 565.93,1592.13 cw(c565.93,1605.11) RN18.6@556.76,1595.93 ; U6.A12@2258.23,1807.3 ccw(c2247.37,1796.45) 2247.37,1811.8 ccw(c2247.37,1827.15) U6.A12@2258.23,1816.29
A13: RN18.8 U6.A13 | length 1847.3
  Top Layer w5: RN18.8@541.15,1655.12 909.12,1655.12 1105.17,1851.17 U6.A13@2262.72,1851.17 ; RN18.8@556.76,1651.33 cw(c565.93,1642.15) 565.93,1655.12 cw(c565.93,1668.1) RN18.8@556.76,1658.92 ; U6.A13@2258.23,1846.67 ccw(c2247.37,1835.82) 2247.37,1851.17 ccw(c2247.37,1866.52) U6.A13@2258.23,1855.66
A14: RN17.5 U6.A14 | length 1834.2
  Top Layer w5: RN17.5@541.15,1726.01 948.01,1726.01 1112.54,1890.54 U6.A14@2262.72,1890.54 ; RN17.5@556.76,1722.21 cw(c565.93,1713.04) 565.93,1726.01 cw(c565.93,1738.99) RN17.5@556.76,1729.81 ; U6.A14@2258.23,1886.04 ccw(c2247.37,1875.19) 2247.37,1890.54 ccw(c2247.37,1905.89) U6.A14@2258.23,1895.03
B5: RN22.6 U6.B5 | length 1987.8
  Top Layer w5: RN22.6@541.15,1096.01 771.01,1096.01 1192,1517 2282.89,1517 U6.B5@2302.09,1536.2 ; RN22.6@556.76,1092.21 cw(c565.93,1083.03) 565.93,1096.01 cw(c565.93,1108.98) RN22.6@556.76,1099.81 ; U6.B5@2295.74,1536.2 cw(c2280.39,1536.2) 2291.24,1525.35 cw(c2302.09,1514.5) U6.B5@2302.09,1529.85
B6: RN22.8 U6.B6 | length 1978
  Top Layer w5: RN22.8@541.15,1159 766,1159 1163,1556 2282.52,1556 U6.B6@2302.09,1575.57 ; RN22.8@556.76,1155.2 cw(c565.93,1146.03) 565.93,1159 cw(c565.93,1171.97) RN22.8@556.76,1162.8 ; U6.B6@2295.74,1575.57 cw(c2280.39,1575.57) 2291.24,1564.72 cw(c2302.09,1553.87) U6.B6@2302.09,1569.22
B8: RN21.7 U6.B8 | length 1955.1
  Top Layer w5: RN21.7@541.15,1292.88 806.88,1292.88 1149,1635 2282.78,1635 U6.B8@2302.09,1654.32 ; RN21.7@556.76,1289.08 cw(c565.93,1279.9) 565.93,1292.88 cw(c565.93,1305.85) RN21.7@556.76,1296.68 ; U6.B8@2295.74,1654.32 cw(c2280.39,1654.32) 2291.24,1643.46 cw(c2302.09,1632.61) U6.B8@2302.09,1647.96
B10: RN20.8 U6.B10 | length 1921.9
  Top Layer w5: RN20.8@541.15,1489.75 863.75,1489.75 1126,1752 2283.15,1752 U6.B10@2302.09,1733.06 ; RN20.8@556.76,1485.95 cw(c565.93,1476.78) 565.93,1489.75 cw(c565.93,1502.72) RN20.8@556.76,1493.55 ; U6.B10@2295.74,1733.06 ccw(c2280.39,1733.06) 2291.24,1743.91 ccw(c2302.09,1754.76) U6.B10@2302.09,1739.41
B12: RN18.7 U6.B12 | length 1900.1
  Top Layer w5: RN18.7@541.15,1623.63 909.63,1623.63 1118,1832 2281.89,1832 U6.B12@2302.09,1811.8 ; RN18.7@556.76,1619.83 cw(c565.93,1610.65) 565.93,1623.63 cw(c565.93,1636.6) RN18.7@556.76,1627.43 ; U6.B12@2295.74,1811.8 ccw(c2280.39,1811.8) 2291.24,1822.65 ccw(c2302.09,1833.5) U6.B12@2302.09,1818.15
B14: RN17.6 U6.B14 | length 1872.5
  Top Layer w5: RN17.6@541.15,1757.51 942.51,1757.51 1095,1910 2269,1910 2288.46,1890.54 ; RN17.6@556.76,1753.71 cw(c565.93,1744.53) 565.93,1757.51 cw(c565.93,1770.48) RN17.6@556.76,1761.31 ; U6.B14@2297.22,1886.45 ccw(c2288.47,1879.11) 2288.47,1890.54 ; U6.B14@2297.22,1894.62 cw(c2288.47,1901.96) 2288.47,1890.54 ; U6.B14@2302.09,1890.54 2288.46,1890.54
B15: RN17.7 U6.B15 | length 1879.6
  Top Layer w5: RN17.7@541.15,1789 925,1789 1085,1949 2283,1949 U6.B15@2302.09,1929.91 ; RN17.7@556.76,1785.2 cw(c565.93,1776.03) 565.93,1789 cw(c565.93,1801.98) RN17.7@556.76,1792.8 ; U6.B15@2295.74,1929.91 ccw(c2280.39,1929.91) 2291.24,1940.76 ccw(c2302.09,1951.61) U6.B15@2302.09,1936.26
B16: RN17.8 U6.B16 | length 1881.7
  Top Layer w5: RN17.8@541.15,1820.5 925.5,1820.5 1092,1987 2284.37,1987 U6.B16@2302.09,1969.28 ; RN17.8@556.76,1816.7 cw(c565.93,1807.53) 565.93,1820.5 cw(c565.93,1833.47) RN17.8@556.76,1824.3 ; U6.B16@2295.74,1969.28 ccw(c2280.39,1969.28) 2291.24,1980.13 ccw(c2302.09,1990.98) U6.B16@2302.09,1975.63
BLUE: C40.1 J4.3 RN31.2 RN31.3 RN31.4 RN32.4 RN32.8 RN33.8 | length 2006.7
  Top Layer w12: J4.3@4135,3004 cw(c4135,2936.4) 4182.8,2984.2 cw(c4230.6,3032) J4.3@4163,3032 ; J4.3@4135,3016 cw(c4135,2977.37) 4162.31,3004.69 cw(c4189.63,3032) J4.3@4151,3032 ; J4.3@4135,3032 4235,2932 4596,2932 4656,2872 4656,2728 4609,2681 4609,2593.85 ; RN31.4@4173.51,2643 4173.51,2669.51 4186,2682 4452,2682 ; RN31.3@4205.01,2643 4205.01,2678.99 ; RN31.2@4236.5,2643 4236.5,2680.5 ; RN32.4@4331.51,2643 4331.51,2678.51 ; RN32.8@4426,2569.85 4426,2577 4452,2603 4452,2682 ; RN32.8@4426,2583.54 ccw(c4426,2599.31) 4437.16,2588.16 ; RN33.8@4585.85,2572.54 ccw(c4585.91,2576.82) RN33.8@4588.94,2573.79 ; RN33.8@4586,2570.85 4609,2593.85 ; RN33.8@4586.03,2584.53 ccw(c4586.5,2616.34) 4609,2593.85 ; 4608,2682 4452,2682
  Bottom Layer w20: J4.3@4118.03,3015.03 cw(c4077.06,2974.06) 4135,2974.06 cw(c4192.94,2974.06) J4.3@4151.97,3015.03 ; C40.1@4135,2940 J4.3@4135,3032
BUZZER: CB1.1 U6.J11 | length 880.6
  Top Layer w5: U6.J11@2571.33,1772.43 ccw(c2555.98,1772.43) 2566.83,1783.28 ccw(c2577.68,1794.13) U6.J11@2577.68,1778.78 ; U6.J11@2577.68,1772.43 2559,1791.11 2559,2069 CB1.1@2692,2202 ; CB1.1@2660.5,2202 cw(c2584.45,2202) 2638.23,2148.23 cw(c2692,2094.45) CB1.1@2692,2170.5 ; CB1.1@2665.5,2202 cw(c2601.52,2202) 2646.76,2156.76 cw(c2692,2111.52) CB1.1@2692,2175.5 ; CB1.1@2670.5,2202 cw(c2618.59,2202) 2655.3,2165.3 cw(c2692,2128.59) CB1.1@2692,2180.5 ; CB1.1@2675.5,2202 cw(c2635.67,2202) 2663.83,2173.83 cw(c2692,2145.67) CB1.1@2692,2185.5
C8: RN20.5 U6.C8 | length 1968.4
  Top Layer w5: RN20.5@541.15,1395.26 851.26,1395.26 1130,1674 2321.78,1674 U6.C8@2341.46,1654.32 ; RN20.5@556.76,1391.46 cw(c565.93,1382.29) 565.93,1395.26 cw(c565.93,1408.24) RN20.5@556.76,1399.06 ; U6.C8@2335.11,1654.32 ccw(c2319.76,1654.32) 2330.61,1665.17 ccw(c2341.46,1676.02) U6.C8@2341.46,1660.67
C9: RN13.5 U6.C9 | length 2248.9
  Top Layer w5: RN13.5@541.15,2056.76 v1@579.24,2056.76 ; RN13.5@556.76,2052.96 cw(c565.93,2043.79) 565.93,2056.76 cw(c565.93,2069.74) RN13.5@556.76,2060.56 ; RN13.5@558.64,2056.76 cw(c558.64,2032.64) v1@575.7,2049.7 ; 567.15,2056.76 ccw(c567.15,2068.85) v1@575.7,2060.3 ; 570.71,2056.76 cw(c570.71,2044.71) v1@579.23,2053.23 ; v1@2320.77,1705.94 cw(c2318.06,1685.96) U6.C9@2335.52,1696.04 ; v1@2321.44,1710.89 cw(c2319.79,1698.73) 2330.42,1704.87 ; v1@2321.78,1705.87 cw(c2321.78,1687.76) 2334.58,1700.57 cw(c2347.39,1713.37) v1@2329.28,1713.37 ; v1(2321.78,1713.37) U6.C9@2341.46,1693.68 ; v1@2323.75,1706.13 cw(c2325.56,1699.47) 2331.54,1702.92 ; v1@2324.26,1713.71 ccw(c2336.42,1715.36) 2330.28,1704.73 ; v1@2329.02,1711.4 ccw(c2335.68,1709.59) 2332.23,1703.61 ; v1@2329.21,1714.38 ccw(c2349.19,1717.09) U6.C9@2339.11,1699.63 ; U6.C9@2335.11,1693.68 ccw(c2319.76,1693.68) 2330.61,1704.54 ccw(c2341.46,1715.39) U6.C9@2341.46,1700.04 ; v1@2323.72,1706.13 cw(c2325.55,1699.3) 2329.08,1705.42 ccw(c2325.55,1699.3) v1@2323.72,1706.13 ; v1@2329.02,1711.43 ccw(c2335.85,1709.6) 2329.73,1706.07 cw(c2335.85,1709.6) v1@2329.02,1711.43
  Mid-Layer 1 w5: v1(581,2055) 749,2055 1073,1731 2295,1731 ; v1@586.3,2049.7 cw(c599.11,2036.89) 599.11,2055 cw(c599.11,2073.11) v1@586.3,2060.3 ; 2302.95,1723.05 ccw(c2320.37,1740.48) v1@2321.65,1715.87 ; 2310.89,1715.11 ccw(c2321.16,1725.37) v1@2321.91,1710.87 ; v1@2321.39,1720.86 cw(c2319.59,1755.59) 2295,1731 ; v1(2321.78,1713.37) 2312.63,1713.37 2295,1731
C10: RN13.7 U6.C10 | length 2253.7
  Top Layer w5: RN13.7@541.15,2119.75 v1@578.75,2119.75 ; RN13.7@556.76,2115.95 cw(c565.93,2106.78) 565.93,2119.75 cw(c565.93,2132.73) RN13.7@556.76,2123.55 ; RN13.7@558.89,2119.75 ccw(c558.89,2142.11) v1@574.7,2126.3 ; 564.9,2119.75 cw(c564.9,2105.9) v1@574.7,2115.7 ; v1@2320.77,1745.31 cw(c2318.06,1725.33) U6.C10@2335.52,1735.41 ; v1@2321.44,1750.26 cw(c2319.79,1738.1) 2330.42,1744.24 ; v1@2321.78,1745.24 cw(c2321.78,1727.13) 2334.58,1739.94 cw(c2347.39,1752.74) v1@2329.28,1752.74 ; v1(2321.78,1752.74) U6.C10@2341.46,1733.06 ; v1@2323.75,1745.5 cw(c2325.56,1738.84) 2331.54,1742.29 ; v1@2324.26,1753.08 ccw(c2336.42,1754.73) 2330.28,1744.1 ; v1@2329.02,1750.77 ccw(c2335.68,1748.96) 2332.23,1742.98 ; v1@2329.21,1753.75 ccw(c2349.19,1756.46) U6.C10@2339.11,1739 ; U6.C10@2335.11,1733.06 ccw(c2319.76,1733.06) 2330.61,1743.91 ccw(c2341.46,1754.76) U6.C10@2341.46,1739.41 ; v1@2323.72,1745.5 cw(c2325.55,1738.67) 2329.08,1744.79 ccw(c2325.55,1738.67) v1@2323.72,1745.5 ; v1@2329.02,1750.8 ccw(c2335.85,1748.97) 2329.73,1745.44 cw(c2335.85,1748.97) v1@2329.02,1750.8
  Mid-Layer 1 w5: v1(580,2121) 739,2121 1085,1775 2167,1775 2183,1759 2315.52,1759 v1(2321.78,1752.74) ; v1@585.3,2115.7 cw(c598.11,2102.89) 598.11,2121 cw(c598.11,2139.11) v1@585.3,2126.3 ; 2288.56,1759 cw(c2288.56,1719.52) v1@2316.48,1747.44 ; 2300.63,1759 cw(c2300.63,1731.6) v1@2320.01,1750.97 ; 2312.7,1759 cw(c2312.7,1743.67) v1@2323.55,1754.51
C15: RN15.5 U6.C15 | length 1940.2
  Top Layer w5: RN15.5@541.15,1891.39 963.39,1891.39 1079,2007 2291,2007 2322,1976 2322,1949.37 U6.C15@2341.46,1929.91 ; RN15.5@556.76,1887.59 cw(c565.93,1878.41) 565.93,1891.39 cw(c565.93,1904.36) RN15.5@556.76,1895.19 ; U6.C15@2335.11,1929.91 ccw(c2319.76,1929.91) 2330.61,1940.76 ccw(c2341.46,1951.61) U6.C15@2341.46,1936.26
C16: RN15.6 U6.C16 | length 1980.9
  Top Layer w5: RN15.6@541.15,1922.88 961.88,1922.88 1067,2028 2294,2028 2341.46,1980.54 ; RN15.6@556.76,1919.08 cw(c565.93,1909.91) 565.93,1922.88 cw(c565.93,1935.86) RN15.6@556.76,1926.68 ; 2322.65,1999.35 cw(c2292.57,1969.28) U6.C16@2335.11,1969.28 ; 2331.18,1990.82 cw(c2309.64,1969.28) U6.C16@2340.11,1969.28 ; U6.C16@2338.18,1974.72 ccw(c2334.67,1980.53) 2341.46,1980.53 ; 2339.72,1982.28 cw(c2326.71,1969.28) U6.C16@2345.11,1969.28 ; U6.C16@2341.46,1969.28 2341.46,1980.54 ; U6.C16@2344.75,1974.72 cw(c2348.25,1980.53) 2341.46,1980.53
CLK: R3.1 U6.T8 | length 321.3
  Top Layer w5: U6.T8@2853.28,1654.32 2979.68,1654.32 R3.1@2990,1644 ; U6.T8@2857.77,1649.82 cw(c2868.63,1638.96) 2868.63,1654.32 cw(c2868.63,1669.67) U6.T8@2857.77,1658.81 ; 2932.51,1654.31 cw(c2932.51,1586.51) R3.1@2980.45,1634.45 ; 2944.58,1654.32 cw(c2944.58,1598.58) R3.1@2983.99,1637.99 ; 2956.65,1654.31 cw(c2956.65,1610.65) R3.1@2987.53,1641.53 ; 2968.72,1654.32 cw(c2968.72,1622.72) R3.1@2991.06,1645.06
D1V2: C5.1 C6.1 C7.1 C8.1 C9.1 C48.1 EC4.1 P4.2 U5.2 U5.4 U6.G7 U6.G9 U6.H8 U6.H10 U6.J7 U6.J9 U6.K8 U6.K10 | length 549.9
  Top Layer w17.72: v1(2479.26,1595.26) U6.G7@2498.94,1614.94 ; v1(2479.26,1713.37) U6.G9@2498.94,1693.68 ; v1(2518.63,1634.63) U6.H8@2538.32,1654.32 ; v1(2518.63,1752.74) U6.H10@2538.32,1733.06 ; U6.J7@2577.68,1614.94 v1(2597.37,1595.26) ; U6.J9@2577.68,1693.68 v1(2597.37,1713.37) ; U6.K8@2617.06,1654.32 v1(2636.74,1634.63) ; U6.K10@2617.06,1733.06 v1(2636.74,1752.74)
  Mid-Layer 1 w17.72: 2566.5,1990.5 v1(2596.5,1990.5)
  Bottom Layer w17.72: C6.1@2473,1677 2473,1707.11 v1(2479.26,1713.37) ; v1(2518.63,1752.74) 2526.89,1761 C8.1@2558,1761 ; C7.1@2558,1592 2594.11,1592 v1(2597.37,1595.26) ; 2586.75,1592 ccw(c2586.75,1605.88) v1@2596.56,1596.07 ; v1@2596.5,1989.06 cw(c2654.07,1989.06) C5.1@2617.1,2033.19 ; v1(2596.5,1990.5) 2596.5,2040.5 2599,2043 C5.1@2614,2043 ; v1(2636.74,1634.63) 2643,1640.89 C9.1@2643,1677
  other v2: 2096,2713 1955,2716 1914,2717 2064,2744 1956,2767 1914,2768 2096,2783 2062,2812 1957,2823 2095,2841
D3V3: C4.2 C10.1 C11.1 C12.1 C13.1 C14.1 C15.1 C16.1 C17.1 C18.1 C19.1 C20.1 C25.1 C27.1 C29.1 C30.1 C31.1 C32.1 C33.1 C34.1 C35.1 C36.1 C37.1 C43.1 C44.1 C49.1 EC5.1 EC6.1 J2.39 J2.40 J3.39 J3.40 J5.1 L1.1 LED7.1 LED8.1 P1.2 P5.2 Q1.2 Q2.2 Q3.2 Q4.2 Q5.2 Q6.2 Q7.2 R1.1 R9.2 R12.1 R13.2 R14.2 R15.2 R17.2 R18.1 R19.1 R23.1 R24.1 R25.1 R26.1 R27.1 R32.1 R35.1 R36.1 R37.1 R38.1 R41.1 R42.1 R43.1 R45.1 R47.1 R50.2 R52.1 U1.2 U1.4 U5.3 U6.B4 U6.B9 U6.B13 U6.D2 U6.D7 U6.D10 U6.D15 U6.E5 U6.F8 U6.F11 U6.G4 U6.G10 U6.G13 U6.H6 U6.J2 U6.J10 U6.J15 U6.K4 U6.K13 U6.L6 U6.L9 U6.N2 U6.N7 U6.N10 U6.N15 U6.R4 U6.R8 U6.R13 U8.8 U9.1 U9.3 U9.9 U9.14 U9.27 U9.43 U9.49 U11.8 U12.8 U14.4 | length 24756.2
  Top Layer w15: 1036,1207 1068,1207 ; Q1.2@1060.58,1235.58 cw(c1042.65,1217.65) 1068,1217.65 cw(c1093.35,1217.65) Q1.2@1075.42,1235.58 ; Q1.2@1068,1243 1068,1207 ; Q6.2@1702.58,1235.58 cw(c1684.65,1217.65) 1710,1217.65 cw(c1735.35,1217.65) Q6.2@1717.42,1235.58 ; Q6.2@1710,1243 1710,1207 1068,1207 ; v1(1799,324) 1799,401 ; v1(2371,329) 2408,329 ; C30.1@2545,345 U9.1@2545,437 ; R32.1@2583.99,2331.01 ccw(c2552.58,2362.42) 2597,2362.42 ; Q7.2@2589.58,2379.58 cw(c2571.65,2361.65) 2597,2361.65 cw(c2622.35,2361.65) Q7.2@2604.42,2379.58 ; R32.1@2597,2332 Q7.2@2597,2387 Q7.2@2606,2387 ; C29.1@2607.99,344.01 U9.3@2607.99,437 ; C31.1@2797,344 U9.9@2796.97,437 ; C35.1@2860,990 2891.46,958.54 U9.43@2891.46,897 v2@2891.46,838 ; v2@2886.7,843.3 ccw(c2875.2,854.8) 2891.46,854.8 ; 2891.46,857.42 ccw(c2911.42,857.42) v2@2897.3,843.3 ; v2@2949.15,383.3 ccw(c2936.34,396.11) 2954.45,396.11 ccw(c2972.56,396.11) v2@2959.75,383.3 ; v2(2954.45,378) U9.14@2954.45,437 ; C33.1@3363.9,347.1 U9.27@3363.9,437 ; v1(3506,326) 3506,228 3507,228
  Top Layer w17: C34.1@2666,992 2702.48,955.52 U9.49@2702.48,897 v2(2702.48,834.48) ; v2@2697.88,839.08 ccw(c2686.79,850.17) 2702.48,850.17 ccw(c2718.17,850.17) v2@2707.08,839.08
  Top Layer w17.72: LED7.1@992,2974 v2(1051,2974) LED8.1@1104,2974 ; LED7.1@1003.41,2962.59 cw(c1030.97,2935.03) 1030.97,2974 cw(c1030.97,3012.97) LED7.1@1003.41,2985.41 ; v2@1054.07,2979.32 ccw(c1066.88,3001.5) 1073.5,2976.76 ; v2@1063.2,2974 ccw(c1063.2,3019.8) LED8.1@1095.59,2987.41 ; 1072.86,2974 cw(c1072.86,2941.86) LED8.1@1095.59,2964.59 ; Q2.2@1189.94,1236.54 cw(c1174.33,1220.93) 1196.4,1220.93 cw(c1218.47,1220.93) Q2.2@1202.86,1236.54 ; 1196.4,1208.4 Q2.2@1196.4,1243 ; Q3.2@1318.34,1236.54 cw(c1302.73,1220.93) 1324.8,1220.93 cw(c1346.87,1220.93) Q3.2@1331.26,1236.54 ; 1324.8,1207.2 Q3.2@1324.8,1243 ; Q4.2@1446.74,1236.54 cw(c1431.13,1220.93) 1453.2,1220.93 cw(c1475.27,1220.93) Q4.2@1459.66,1236.54 ; 1453.2,1211.8 Q4.2@1453.2,1243 ; Q5.2@1575.14,1236.54 cw(c1559.53,1220.93) 1581.6,1220.93 cw(c1603.67,1220.93) Q5.2@1588.06,1236.54 ; 1581.6,1214.4 Q5.2@1581.6,1243 ; v2(2202,2242) U11.8@2254,2242 ; v1(2282.41,1477.15) U6.B4@2302.09,1496.83 ; v1(2282.41,1713.37) U6.B9@2302.09,1693.68 ; v1(2282.41,1870.85) U6.B13@2302.09,1851.17 ; v1(2361.15,1398.41) U6.D2@2380.83,1418.09 ; v1(2361.15,1595.26) U6.D7@2380.83,1614.94 ; v1(2361.15,1752.74) U6.D10@2380.83,1733.06 ; v1(2361.15,1949.59) U6.D15@2380.83,1929.91 ; v1(2400.52,1516.52) U6.E5@2420.2,1536.2 ; v1(2439.89,1634.63) U6.F8@2459.57,1654.32 ; v1(2439.89,1792.11) U6.F11@2459.57,1772.43 ; v1(2479.26,1477.15) U6.G4@2498.94,1496.83 ; v1(2479.26,1752.74) U6.G10@2498.94,1733.06 ; v1(2479.26,1870.85) U6.G13@2498.94,1851.17 ; v1(2518.63,1555.89) U6.H6@2538.32,1575.57 ; U6.J2@2577.68,1418.09 v1(2597.37,1398.41) ; U6.J10@2577.68,1733.06 v1(2597.37,1752.74) ; U6.J15@2577.68,1929.91 v1(2597.37,1949.59) ; U6.K4@2617.06,1496.83 v1(2636.74,1477.15) ; U6.K13@2617.06,1851.17 v1(2636.74,1870.85) ; U6.L6@2656.43,1575.57 v1(2676.11,1555.89) ; U6.L9@2656.43,1693.68 v1(2676.11,1713.37) ; U6.N2@2735.17,1418.09 v1(2754.85,1398.41) ; U6.N7@2735.17,1614.94 v1(2754.85,1595.26) ; U6.N10@2735.17,1733.06 v1(2754.85,1752.74) ; U6.N15@2735.17,1929.91 v1(2754.85,1949.59) ; U6.R4@2813.91,1496.83 v1(2833.59,1477.15) ; U6.R8@2813.91,1654.32 v1(2833.59,1634.63) ; U6.R13@2813.91,1851.17 v1(2833.59,1870.85) ; v2(3006,1895) R17.2@3043,1895 ; v2@3009.41,1900.11 ccw(c3021.3,1917.9) 3026.84,1897.23 ; v2@3018.52,1895 ccw(c3018.52,1922.48) R17.2@3037.95,1903.05
  Top Layer w20: R1.1@1295,2838 1295,2841 C44.1@1377,2841 ; R1.1@1299.24,2833.76 cw(c1316.73,2816.27) 1316.73,2841 ; 2429,344.01 C29.1@2607.99,344.01 ; Q7.2@2602.66,2381.34 cw(c2616.31,2367.69) 2616.31,2387 cw(c2616.31,2406.31) Q7.2@2602.66,2392.66 ; Q7.2@2606,2387 2634,2387 2885,2638 2885,2893 ; 2764,230 2764,344 C31.1@2797,344 ; 2924,228 2924,347 C32.1@2955,347 v2@2955,383.3 ; R9.2@3003,1428 v1(3035,1428) ; R50.2@3054,1765 3085,1765 v2(3090,1760) ; R50.2@3065.86,1765 cw(c3065.86,1735.86) v2@3086.46,1756.46 ; 3186,2893 3186,2644 3455,2644 3455,2562 U12.8@3497,2562 C37.1@3580,2562 3632,2562 R23.1@3632,2467 R24.1@3632,2407 ; 3254,2893 3254,3109.17 J5.1@3303,3109.17 ; J5.1@3289.19,3095.37 ccw(c3255.86,3062.03) 3255.86,3109.17 ccw(c3255.86,3156.32) J5.1@3289.19,3122.98 ; 3322,228 3322,347 C33.1@3364,347 ; L1.1@3754,1434 3824,1434 v1(3833,1443) cw(c3811.27,1464.73) 3811.27,1434 ; U8.8@4360,1605 v2(4409,1605) C4.2@4441.76,1605 ; R42.1@4537,716 4537,821.65
  Top Layer w22: R52.1@4176,717 4176,821.65 ; R45.1@4236,717 4236,821.65 ; R41.1@4297,717 4297,821.65 ; 4361,821.65 4361,651 C43.1@4417,651 4417.66,651 U14.4@4417.66,568.82 ; R43.1@4477,716 4477,821.65 ; R47.1@4596,716 4596,821.65
  Top Layer w40: 1036,1207 1036,401 1799,401 v1@2426,401 ; v2(2296,2893) 2885,2893 3186,2893 3246,2893 ; 2372.79,401 ccw(c2372.79,462.21) 2416.07,418.93 ; 2399.34,401 cw(c2399.34,377.34) v1@2416.07,394.07 ; 2425,232 2425,228 2764,228 ; 2764,230 2764,228 ; 3506,228 3322,228 2924,228 2764,228 ; 3507,228 4041,228 v1(4041,327) ; v1(4041,682) 4041,821.65 4176,821.65 4236,821.65 4297,821.65 4361,821.65 4477,821.65 4537,821.65 4596,821.65 J2.39@4901,821.65 J2.40@5001,821.65
  Mid-Layer 1 w20: 4330,1388 4330,1605 v2(4409,1605)
  Mid-Layer 1 w40: J3.40@117,2721.65 117,2761 ; J3.40@128.63,2713.86 cw(c217,2654.61) 217,2761 ; J3.40@139.01,2721.76 cw(c168.08,2683.6) J3.39@205.95,2713.06 ; 171.15,2746.25 cw(c199.98,2708.41) J3.39@237.52,2737.62 ; 191.98,2761 cw(c191.98,2704.88) J3.39@238.6,2736.13 ; J3.39@198.62,2740.04 cw(c249.22,2689.43) 249.22,2761 ; J3.39@205.37,2713.86 ccw(c117,2654.61) 117,2761 ; J3.39@217,2721.65 217,2761 ; J3.39@226.9,2711.75 cw(c345.79,2592.86) 345.79,2761 ; 1189.81,2761 cw(c1189.81,2645.81) P1.2@1271.26,2727.26 ; 1254.4,2753.28 cw(c1270.68,2739.98) P1.2@1270.68,2761 ; P1.2@1285.38,2727.97 cw(c1355,2671.11) 1355,2761 217,2761 ; P1.2@1286.38,2761 cw(c1286.38,2742.38) 1299.55,2755.55 ; 1333.27,2761 ccw(c1333.27,2796.73) v2@1358.54,2771.46 ; 1338.63,2756.61 ccw(c1329.8,2789.55) v2@1359.33,2772.5 ; 117,2761 217,2761
  Mid-Layer 1 w60: 3849,1388 4330,1388 4736,1388 4736,821.65 J2.39@4901,821.65 J2.40@5001,821.65
  Bottom Layer w8: v1(2439.89,1792.11) 2459,1811.22 2459,1842 2479.26,1862.26 v1(2479.26,1870.85) ; v1@2439.89,1798.11 ccw(c2439.89,1812.6) 2450.13,1802.35 ccw(c2460.37,1792.11) v1@2445.89,1792.11 ; 2462.94,1845.94 ccw(c2438.03,1870.85) v1@2473.26,1870.85 ; 2476.6,1859.6 ccw(c2465.34,1870.85) v1@2481.26,1870.85
  Bottom Layer w15: R38.1@1792.99,302.01 ccw(c1778.48,316.52) 1799,316.52 ccw(c1819.52,316.52) R38.1@1805.01,302.01 ; v1@1796.83,322.75 cw(c1785.88,316.43) 1798.1,313.15 ; R38.1@1799,296 v1(1799,324) ; 1799.9,313.15 cw(c1812.12,316.43) v1@1801.17,322.75 ; R37.1@2364.99,302.01 ccw(c2350.48,316.52) 2371,316.52 ccw(c2391.52,316.52) R37.1@2377.01,302.01 ; R37.1@2371,296 v1(2371,329) ; R36.1@2931.99,302.01 ccw(c2917.48,316.52) 2938,316.52 ccw(c2958.52,316.52) R36.1@2944.01,302.01 ; R36.1@2938,296 2938,361.55 v2(2954.45,378) ; v2@2946.95,378 cw(c2928.84,378) 2941.65,365.2 cw(c2954.45,352.39) v2@2954.45,370.5 ; R35.1@3499.99,302.01 ccw(c3485.48,316.52) 3506,316.52 ccw(c3526.52,316.52) R35.1@3512.01,302.01 ; v1@3503.83,324.75 cw(c3491.35,317.54) 3505.27,313.81 ; R35.1@3506,296 v1(3506,326) ; 3506.73,313.81 cw(c3520.65,317.54) v1@3508.17,324.75 ; R19.1@4034.99,303.01 ccw(c4020.48,317.52) 4041,317.52 ccw(c4061.52,317.52) R19.1@4047.01,303.01 ; R18.1@4034.99,660.01 ccw(c4020.48,674.52) 4041,674.52 ccw(c4061.52,674.52) R18.1@4047.01,660.01 ; v1@4038.83,325.75 cw(c4026.35,318.54) 4040.27,314.81 ; v1@4038.83,680.75 cw(c4027.88,674.43) 4040.1,671.15 ; R19.1@4041,297 v1(4041,327) ; R18.1@4041,654 v1(4041,682) ; 4041.73,314.81 cw(c4055.65,318.54) v1@4043.17,325.75 ; 4041.9,671.15 cw(c4054.12,674.43) v1@4043.17,680.75
  Bottom Layer w17.72: v2(1051,2974) 1281,2974 ; v2(1544,2834) 1544,3358.59 P5.2@1643.78,3458.37 ; P5.2@1627.64,3458.37 cw(c1588.67,3458.37) 1616.22,3430.81 cw(c1643.78,3403.26) P5.2@1643.78,3442.23 ; C36.1@2169,2242 v2(2202,2242) 2266,2242 R27.1@2305,2203 R25.1@2305,2143 R26.1@2305,2083 2324,2064 2324,1945 ; C14.1@2255.37,1713.37 v1(2282.41,1713.37) ; C13.1@2257,1872 v1@2281.26,1872 ; v1@2283,1477.74 2283,1494 C16.1@2286,1497 ; v1@2283.4,1477.71 cw(c2297.35,1485.65) C16.1@2286,1497 ; C16.1@2286.13,1508.86 ccw(c2307,1521.29) 2307,1497 C16.1@2286,1497 ; R27.1@2297.86,2203 ccw(c2280.62,2203) 2292.81,2215.19 ccw(c2305,2227.38) R27.1@2305,2210.14 ; R26.1@2299.95,2077.95 cw(c2241.89,2019.89) 2324,2019.89 ; R26.1@2299.95,2088.05 ccw(c2287.76,2100.24) 2305,2100.24 ccw(c2322.24,2100.24) R26.1@2310.05,2088.05 ; R25.1@2299.95,2137.95 cw(c2287.76,2125.76) 2305,2125.76 cw(c2322.24,2125.76) R25.1@2310.05,2137.95 ; R25.1@2299.95,2148.05 ccw(c2287.76,2160.24) 2305,2160.24 ccw(c2322.24,2160.24) R25.1@2310.05,2148.05 ; R27.1@2299.95,2197.95 cw(c2287.76,2185.76) 2305,2185.76 cw(c2322.24,2185.76) R27.1@2310.05,2197.95 ; R26.1@2304.8,2075.86 cw(c2304.26,2056.13) 2324,2056.13 ; R26.1@2305,2075.86 cw(c2305,2058.62) 2317.19,2070.81 cw(c2329.38,2083) R26.1@2312.14,2083 ; R26.1@2312.48,2090.48 cw(c2284.66,2062.66) 2324,2062.66 ; C15.1@2361.15,1368 v1(2361.15,1398.41) ; v1(2361.15,1949.59) C12.1@2361.15,1979.85 ; C17.1@2597.37,1370.63 v1(2597.37,1398.41) ; v1(2597.37,1949.59) C11.1@2634.41,1949.59 ; C11.1@2635,1949 2657.5,1926.5 ; C18.1@2754.85,1368.85 v1(2754.85,1398.41) ; v1@2755,1949.74 C10.1@2755,1976 ; v1(2833.59,1477.15) C27.1@2865.15,1477.15 ; v1(2833.59,1634.63) C25.1@2867.37,1634.63 ; v1@2833.59,1876.74 cw(c2864.26,1876.74) C20.1@2842.58,1898.42 ; 2835,1848 2858,1848 ; C20.1@2840,1901 2833.59,1894.59 v1(2833.59,1870.85) 2835.15,1870.85 2858,1848 ; 2853.74,1477.15 ccw(c2853.74,1492.26) C27.1@2864.42,1481.58 ; R12.1@2888.95,1817.05 ccw(c2876.76,1829.24) 2894,1829.24 ccw(c2911.24,1829.24) R12.1@2899.05,1817.05 ; R12.1@2894,1812 2894,1848 ; v2(3006,1895) 2959,1848 2894,1848 ; 2858,1848 2894,1848
  Bottom Layer w20: R12.1@2894,1812 3038,1812 v2(3090,1760) ; v1(3035,1428) 3035,1519 ; R15.2@4277.1,1613.9 cw(c4291.83,1599.17) 4291.83,1620 ; R14.2@4284,1505 4284,1620 R13.2@4365,1620 ; 4284,1582.27 cw(c4308.73,1582.27) 4291.24,1599.76 cw(c4340.11,1550.89) 4340.11,1620 ; v2@4405.23,1601.71 ccw(c4365,1566.6) R13.2@4365,1620 ; v2(4409,1605) 4409,1620 R13.2@4365,1620
  Bottom Layer w30: 2426.97,892 2702.48,892 ; v2(2702.48,834.48) 2702.48,892 ; v2(2892,838) 2892,892 2702.48,892
  Bottom Layer w40: P1.2@1262,2750 P1.2@1278,2734
  Bottom Layer w60: 1558,2994 2194,2994 v2(2249,2939) ; 2426.97,392 2426.97,892 2426.97,1387 ; 2883,1536 2891,1528 3575,1528 ; 3579,1524 3643,1460 v1@3850,1460
  other v1: 2409,387 2443,387 2426,406 2409,426 2444,426 3866,1443 3850,1457 3834,1472 3865,1472
  other v2: 1356,2719 1543,2719 1407,2720 1592,2720 1355,2775 1404.42,2775 1543.9,2776.68 1590,2779 1590,2835 2249,2892
D11: RN13.8 U6.D11 | length 2271.5
  Top Layer w5: RN13.8@541.15,2151.25 v1@579.75,2151.25 ; RN13.8@556.76,2147.45 cw(c565.93,2138.28) 565.93,2151.25 cw(c565.93,2164.22) RN13.8@556.76,2155.05 ; 561.29,2151.25 cw(c561.29,2132.29) v1@574.7,2145.7 ; 562.5,2151.25 ccw(c562.5,2168.5) v1@574.7,2156.3 ; v1@2360.14,1784.68 cw(c2357.43,1764.7) U6.D11@2374.89,1774.78 ; v1@2360.81,1789.63 cw(c2359.16,1777.47) 2369.79,1783.61 ; v1@2361.15,1784.61 cw(c2361.15,1766.5) 2373.95,1779.31 cw(c2386.76,1792.11) v1@2368.65,1792.11 ; v1(2361.15,1792.11) U6.D11@2380.83,1772.43 ; v1@2363.12,1784.87 cw(c2364.93,1778.21) 2370.91,1781.66 ; v1@2363.63,1792.45 ccw(c2375.79,1794.1) 2369.65,1783.47 ; v1@2368.58,1793.12 ccw(c2388.56,1795.83) U6.D11@2378.48,1778.37 ; 2371.6,1782.35 cw(c2375.05,1788.33) v1@2368.39,1790.14 ; U6.D11@2374.48,1772.43 ccw(c2359.13,1772.43) 2369.98,1783.28 ccw(c2380.83,1794.13) U6.D11@2380.83,1778.78 ; v1@2368.39,1790.17 ccw(c2375.22,1788.34) 2369.1,1784.81 cw(c2375.22,1788.34) v1@2368.39,1790.17 ; v1@2363.09,1784.87 cw(c2364.92,1778.04) 2368.45,1784.16 ccw(c2364.92,1778.04) v1@2363.09,1784.87
  Mid-Layer 1 w5: v1(580,2151) 741,2151 1098,1794 2173,1794 2196,1771 2340.04,1771 v1(2361.15,1792.11) ; v1@585.3,2145.7 cw(c598.11,2132.89) 598.11,2151 cw(c598.11,2169.11) v1@585.3,2156.3 ; v1@2353.65,1792.11 cw(c2335.54,1792.11) 2348.35,1779.31 cw(c2361.15,1766.5) v1@2361.15,1784.61
D16: RN15.7 U6.D16 | length 1956.4
  Top Layer w5: RN15.7@541.15,1954.38 964.38,1954.38 1059,2049 2301.11,2049 U6.D16@2380.83,1969.28 ; RN15.7@556.76,1950.58 cw(c565.93,1941.4) 565.93,1954.38 cw(c565.93,1967.35) RN15.7@556.76,1958.18 ; U6.D16@2374.48,1969.28 ccw(c2359.13,1969.28) 2369.98,1980.13 ccw(c2380.83,1990.98) U6.D16@2380.83,1975.63